# Altium PCB PCB1.PcbDoc
Units mm, origin at the board's own origin, x right, y up, seen from the top; angles counter-clockwise.
Board outline 56.4 x 56.4 mm, 4 copper layers (Top Layer, Layer 1, Layer 2, Bottom Layer), stack 0.603 mm thick; 62 components, 46 nets, 248 pads, 167 vias.
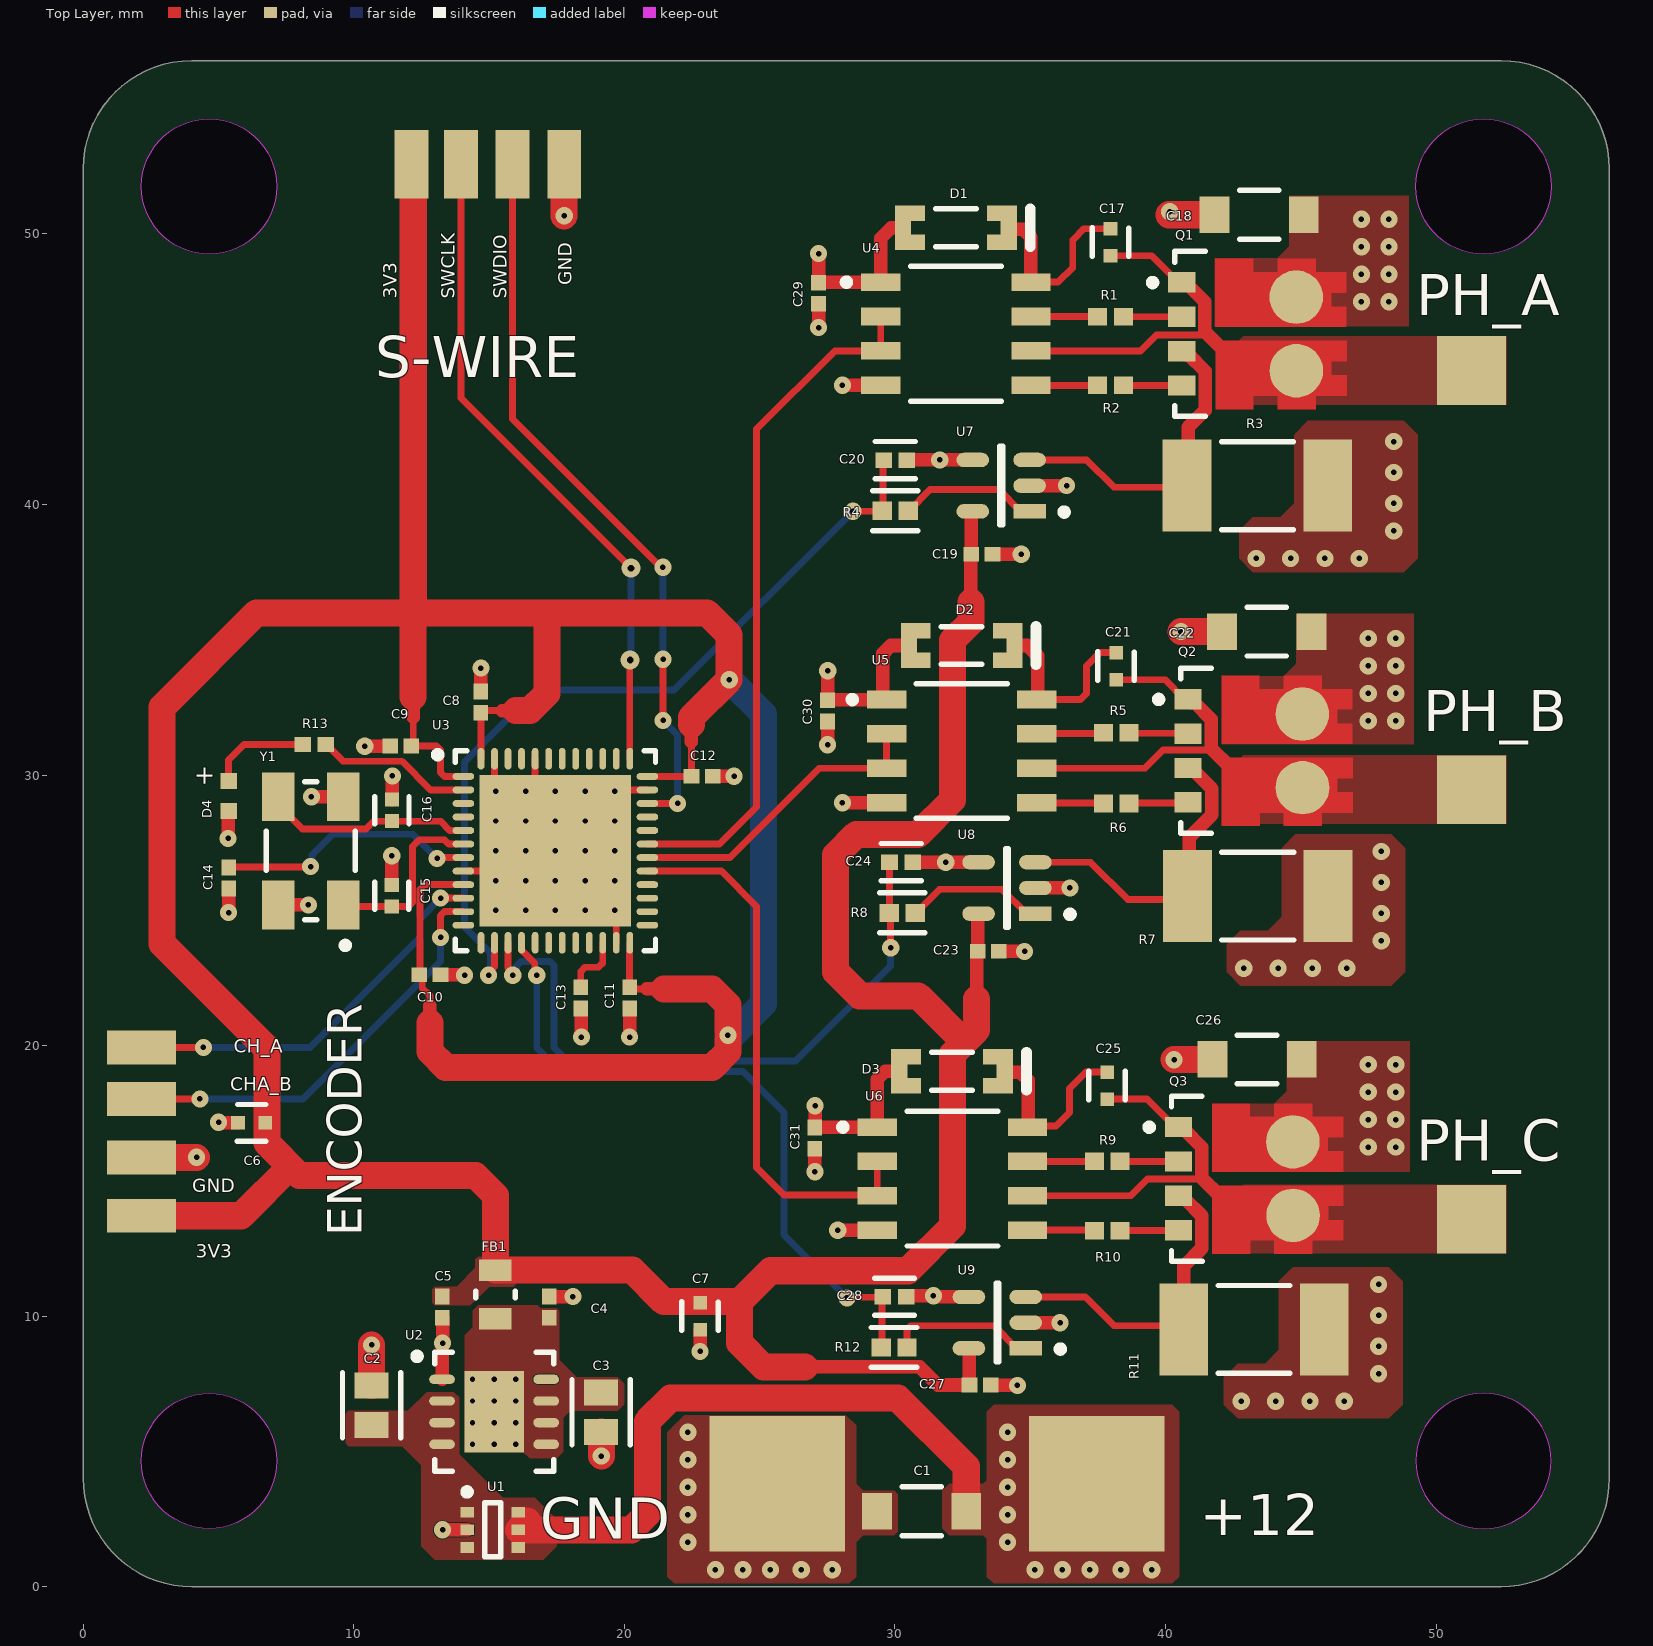
[diagram p0: Top Layer view]
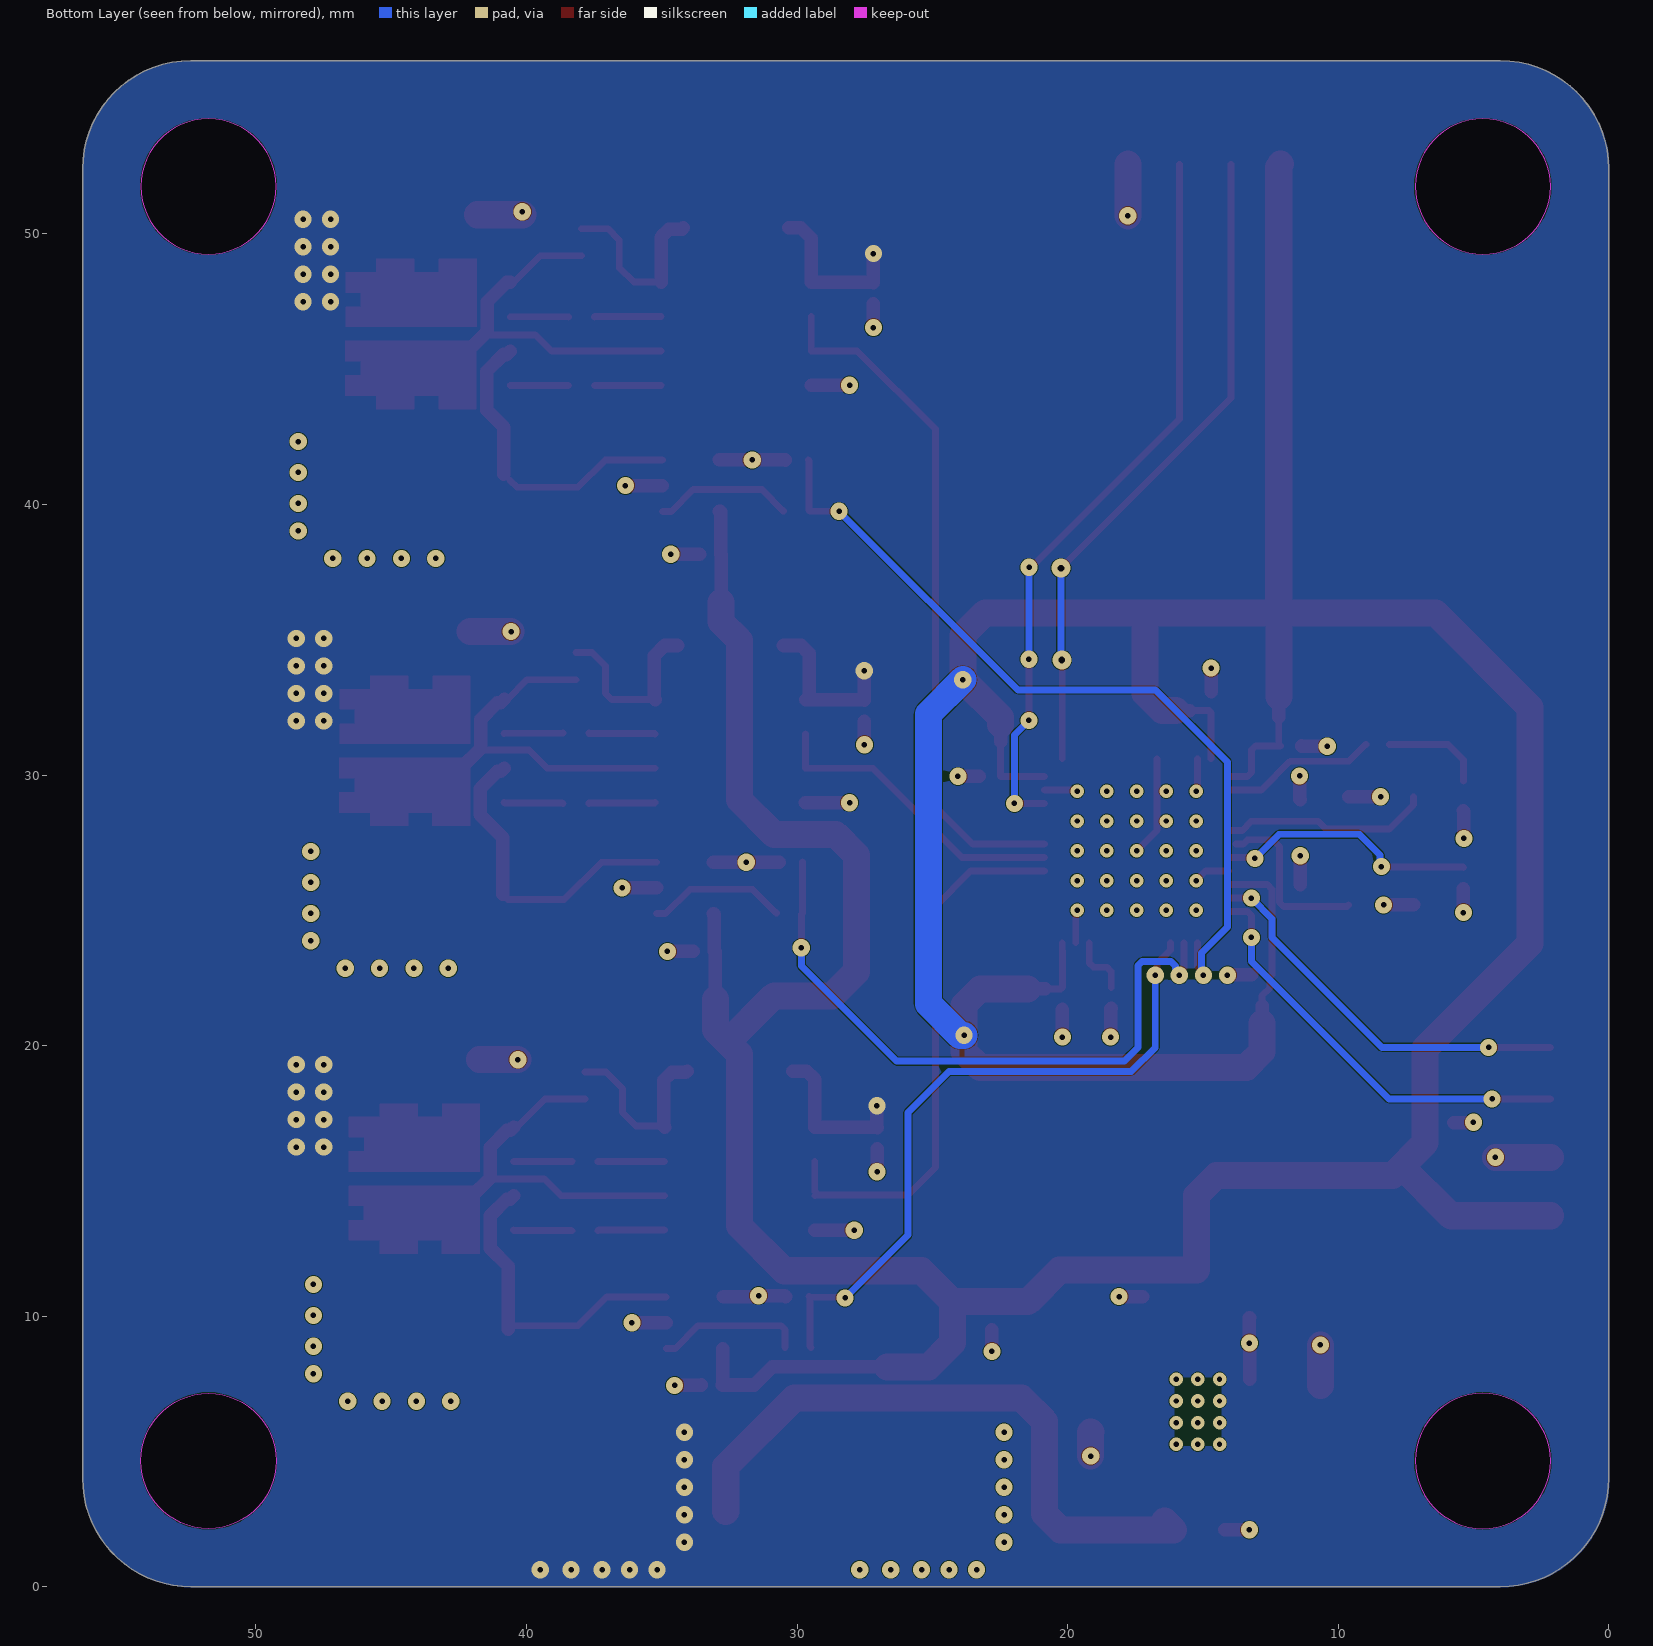
[diagram p1: Bottom Layer view, seen from below]
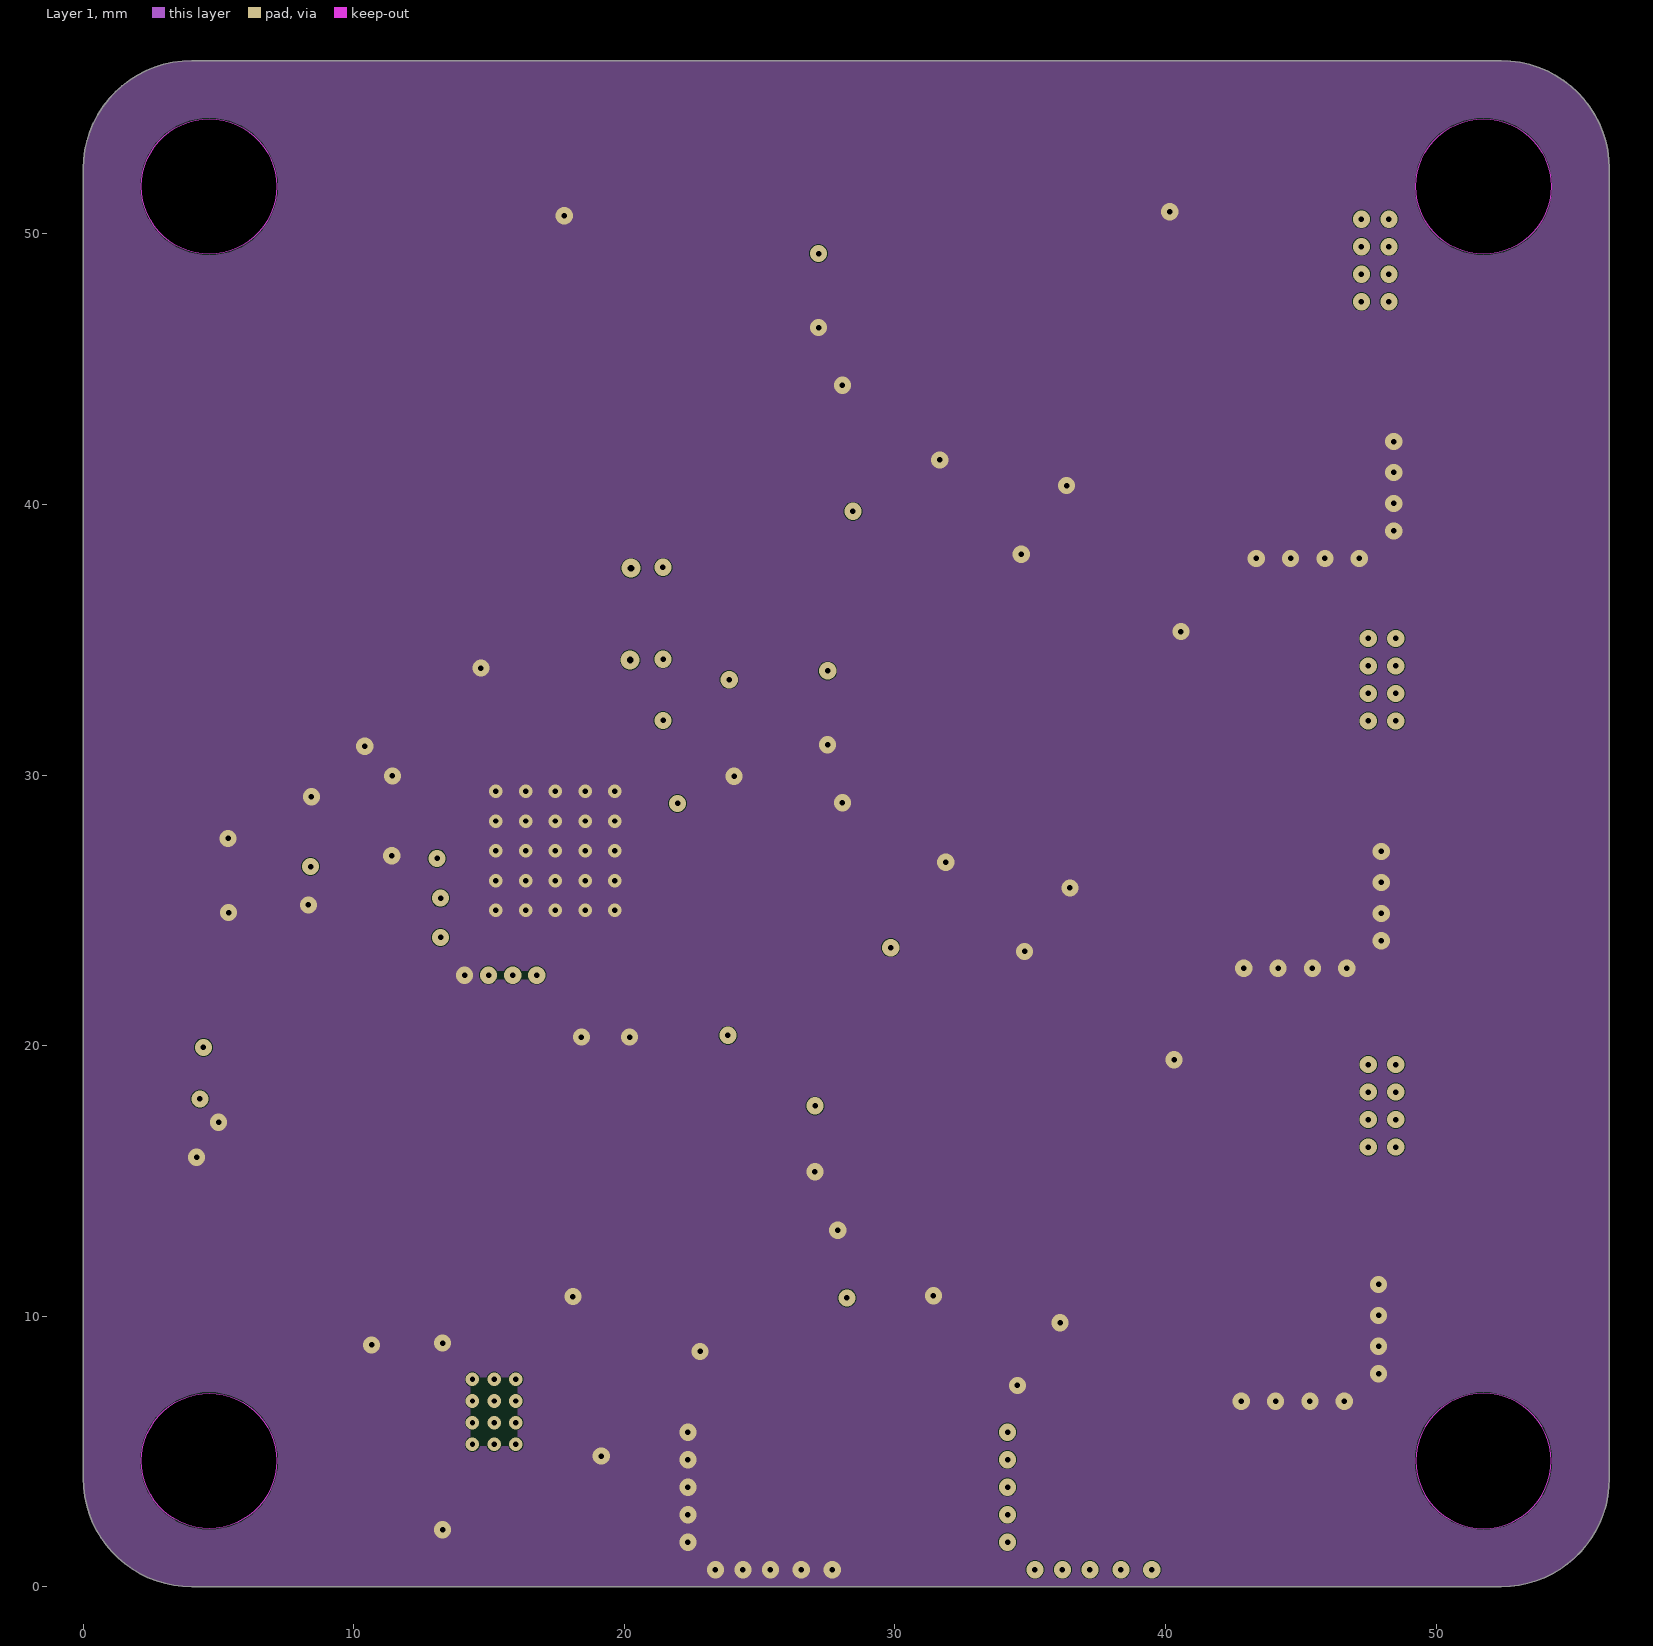
[diagram p2: Layer 1]
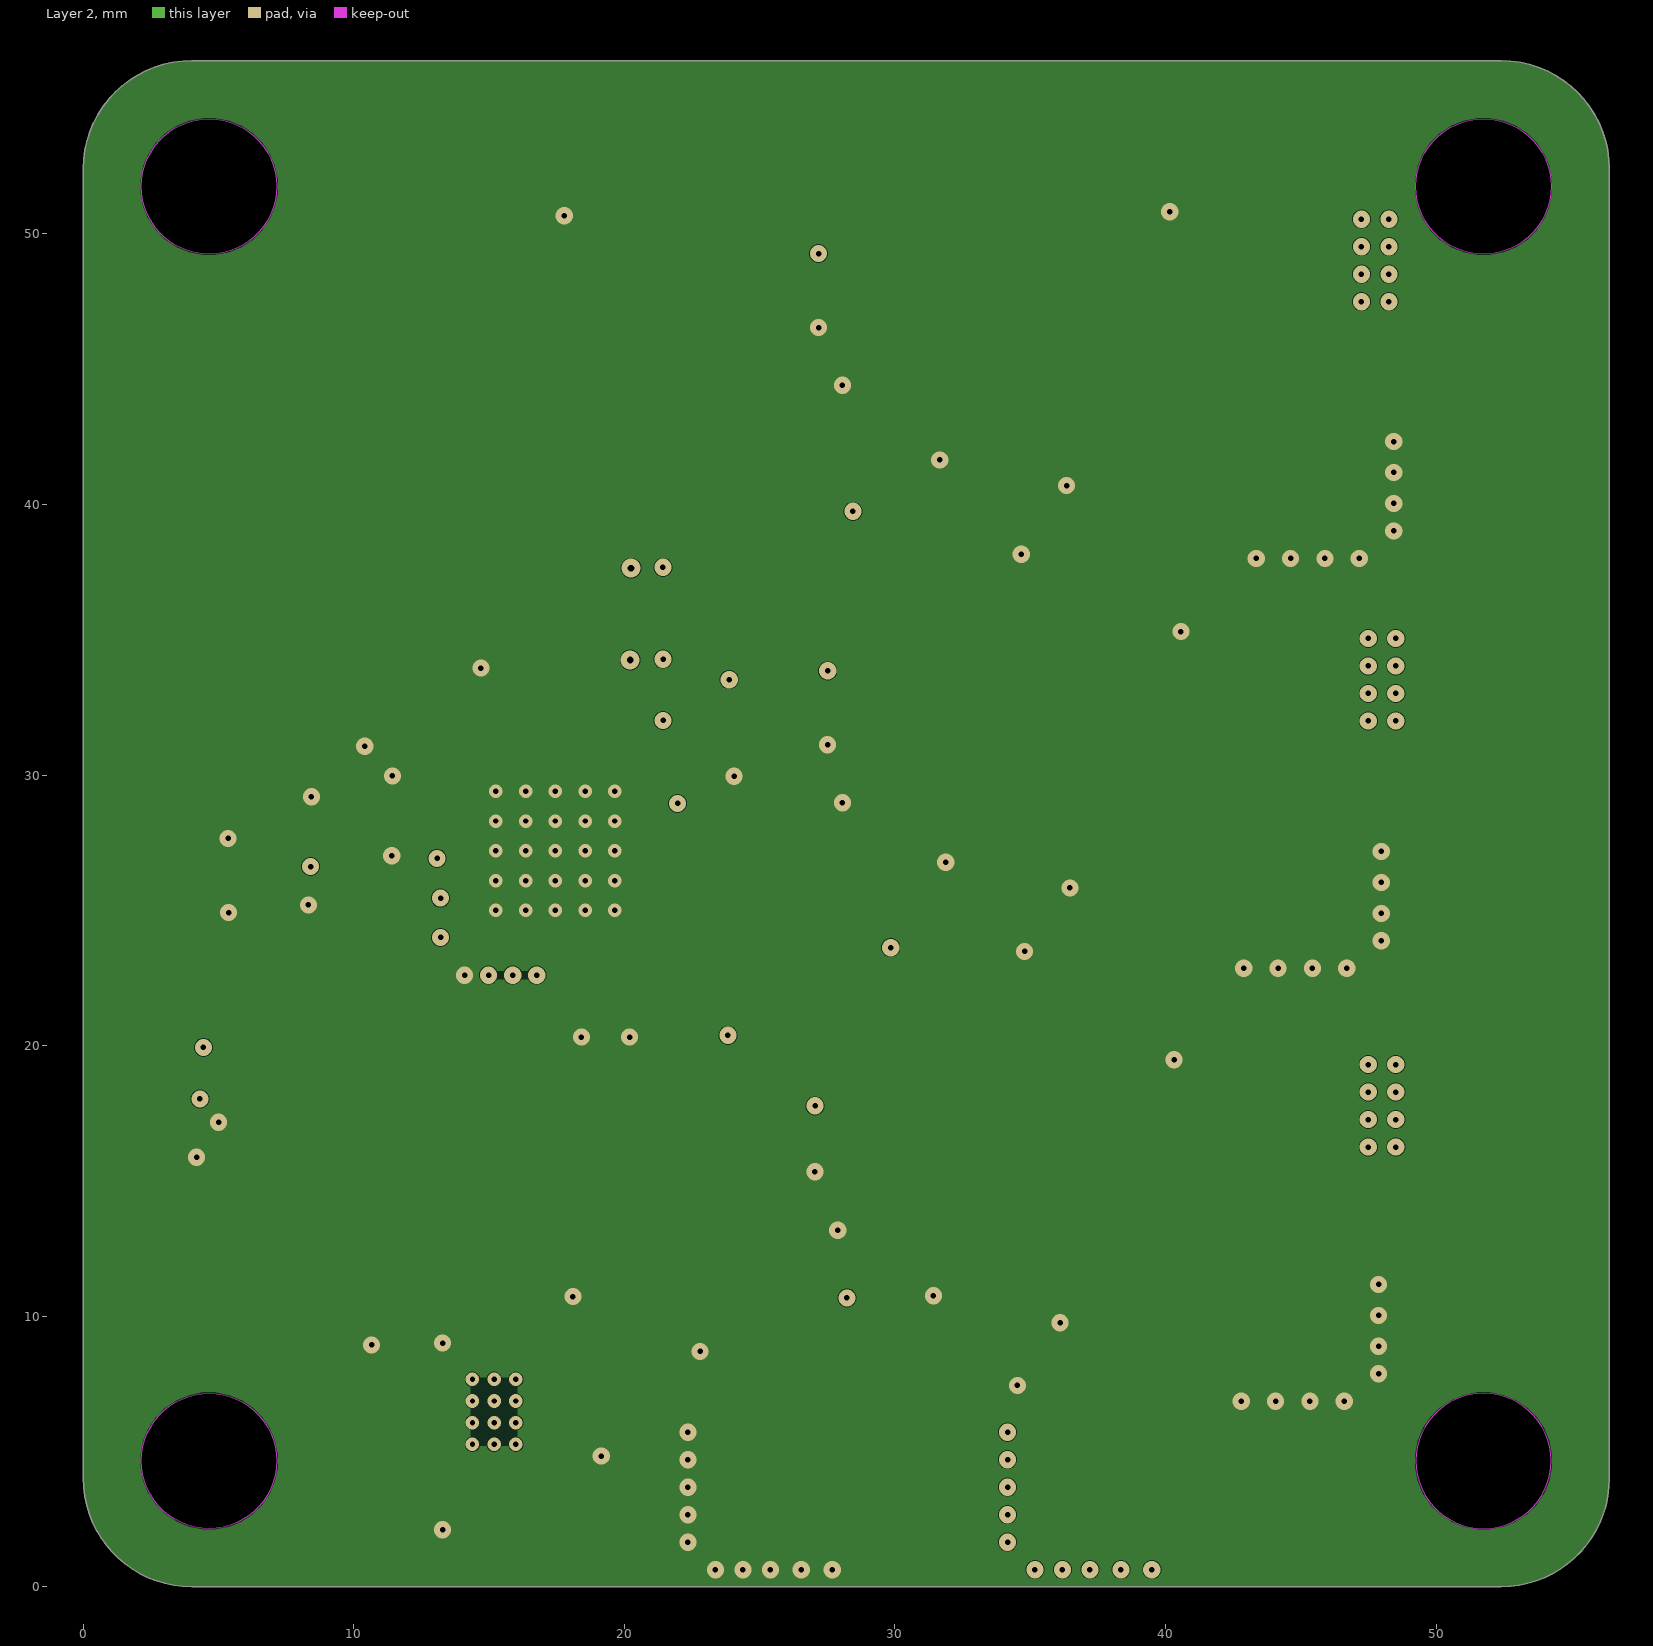
[diagram p3: Layer 2]
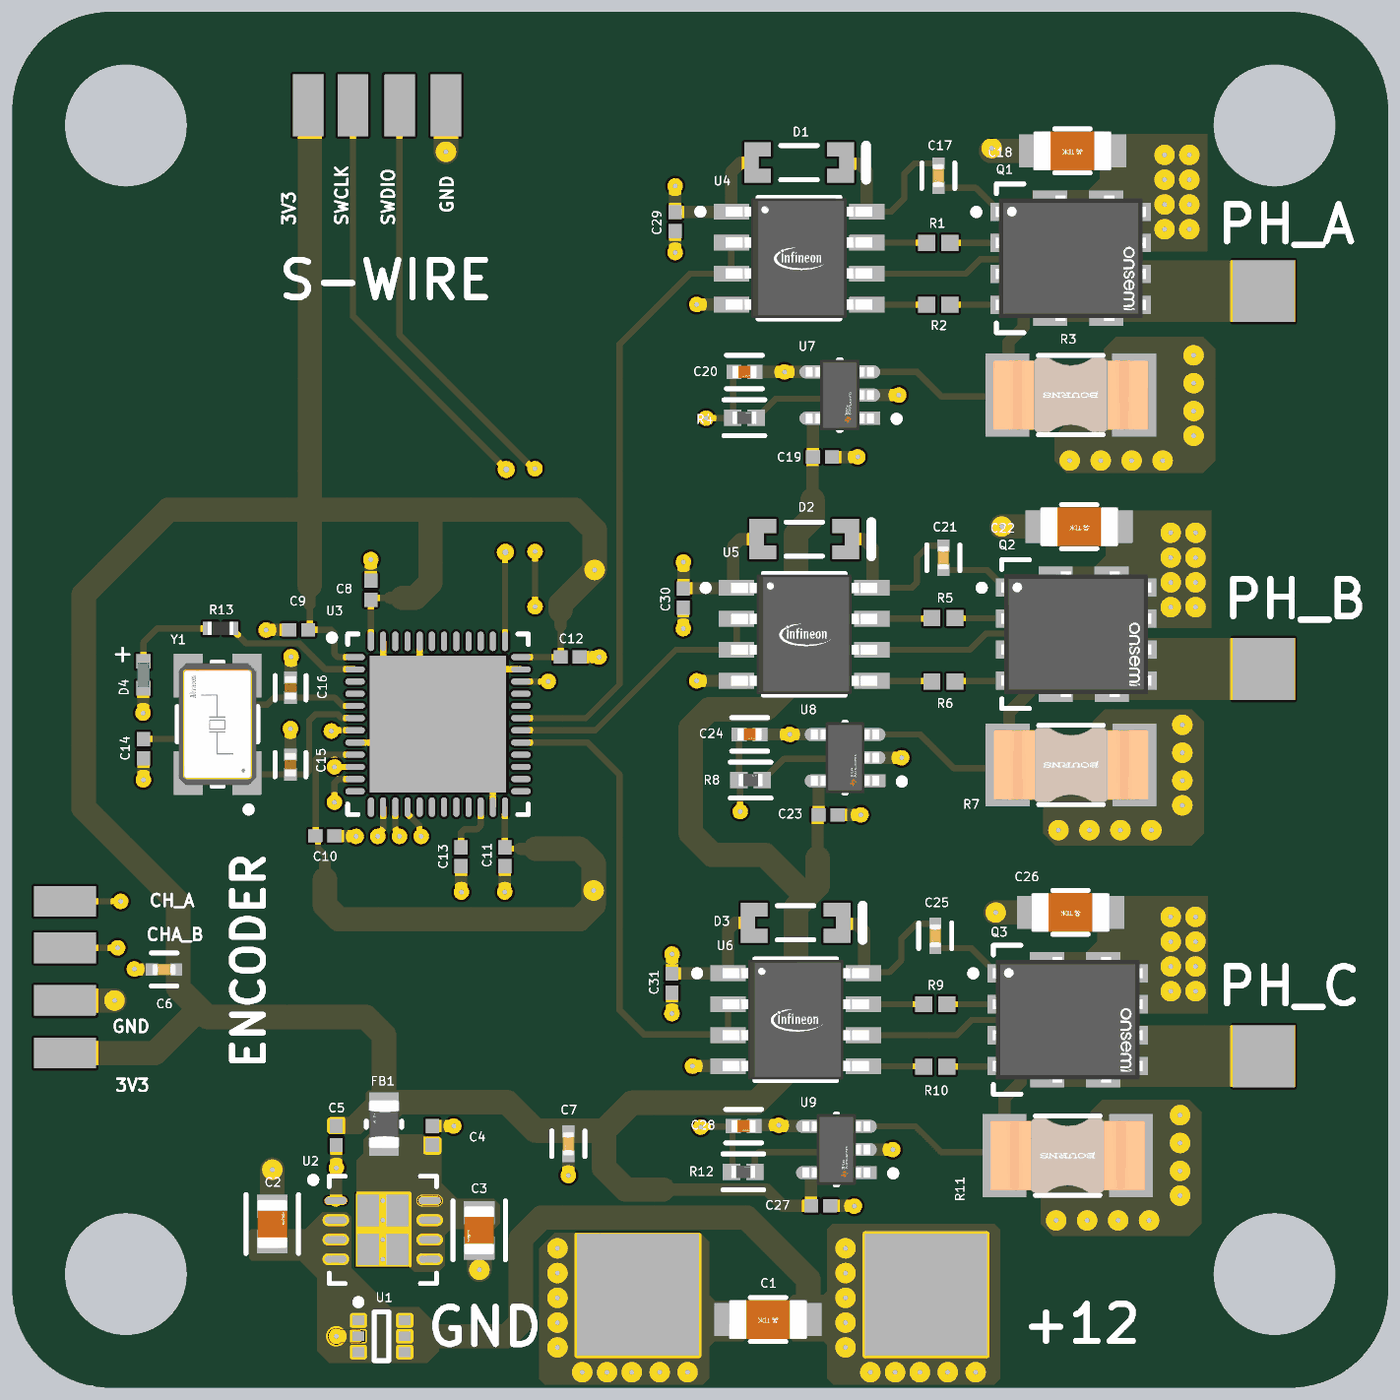
[diagram p4: 3D render of the assembled board from above, using the file's embedded part models]

## Layer stack, top to bottom
Top Solder: solder mask 0.0102, Solder Resist, Dk 3.5
Top Layer: signal copper 0.0356
Dielectric 2: prepreg 0.0711, PP-006, Dk 4.1
Layer 1: signal copper 0.035
Dielectric 1: dielectric 0.32, FR-4, Dk 4.8
Layer 2: signal copper 0.035
Dielectric 3: prepreg 0.0711, PP-006, Dk 4.1
Bottom Layer: signal copper 0.0356
Bottom Solder: solder mask 0.0102, Solder Resist, Dk 3.5

## Board outline
0.006,4.006 0.006,52.406 cw(c4.006,52.406) 4.006,56.406 52.406,56.406 cw(c52.406,52.406) 56.406,52.406 56.406,4.006 cw(c52.406,4.006) 52.406,0.006 4.006,0.006 cw(c4.006,4.006)
cut-out: 4.656,2.156 cw(c4.656,4.656) 2.156,4.656 cw(c4.656,4.656) 4.656,7.156 cw(c4.656,4.656) 7.156,4.656 cw(c4.656,4.656)
cut-out: 49.256,4.656 ccw(c51.756,4.656) 51.756,2.156 ccw(c51.756,4.656) 54.256,4.656 ccw(c51.756,4.656) 51.756,7.156 ccw(c51.756,4.656)
cut-out: 51.756,49.256 cw(c51.756,51.756) 49.256,51.756 cw(c51.756,51.756) 51.756,54.256 cw(c51.756,51.756) 54.256,51.756 cw(c51.756,51.756)
cut-out: 4.656,49.256 cw(c4.656,51.756) 2.156,51.756 cw(c4.656,51.756) 4.656,54.256 cw(c4.656,51.756) 7.156,51.756 cw(c4.656,51.756)

## Design rules (kind name [scope] priority, off if disabled: settings)
Clearance [All] p1: gap=0.025 ignorepadtopadclearanceinfootprint=TRUE
MinimumSolderMaskSliver [All] p1: minsoldermaskwidth=0.025
PolygonConnect [All] p1: connectstyle=Direct reliefconductorwidth=0.254 reliefentries=4 polygonreliefangle="90 Angle" airgapwidth=0.254
RoutingVias [All] p1: holewidth=0.25 width=0.7 viastyle="Through Hole" minholewidth=0.2 minwidth=0.5 maxholewidth=0.35 maxwidth=0.8
ShortCircuit [All] p1: allowed=TRUE
SolderMaskExpansion [All] p1: expansion=0.102 istentingtop=FALSE
SupplyNets "Schematic Supply Nets_3" [InNet('+3V3')] p1: voltage=0.000
SupplyNets "Schematic Supply Nets_2" [InNet('+12')] p2: voltage=0.000
SupplyNets "Schematic Supply Nets_1" [InNet('+3V3R')] p3: voltage=0.000
SupplyNets "Schematic Supply Nets" [InNet('GND')] p4: voltage=0.000
Width [All] p1: maxlimit=1 minlimit=0.254 preferedwidth=0.254
28 further rules are at their usual default settings.

## Components (designator, comment, footprint, x,y, rotation, side; value= is the part's Value field where it differs from the comment)
C1 "47u" FP-C3216-160-0_2-MFG 30.988,2.794 r180 top
C2 "10u" FP-GRM21B-0_1-IPC_C 10.66,6.711 r90 top
C3 "10u" FP-GRM21B-0_1-IPC_C 19.143,6.452 r270 top
C4 "100n" CAPC1005X56X25LL10T15 17.221,10.338 r270 top
C5 "100n" CAPC1005X56X25LL10T15 13.279,10.338 r90 top
C6 "1u" FP-CC0402-MFG 6.223,17.145 r180 top value="1 uF"
C7 "1u" FP-CC0402-MFG 22.8,10 r270 top value="1 uF"
C8 "100n" CAPC1005X56X25LL10T15 14.7,32.7 r270 top
C9 "100n" CAPC1005X56X25LL10T15 11.74,31.078 r0 top
C10 "100n" CAPC1005X56X25LL10T15 12.816,22.624 r180 top
C11 "100n" CAPC1005X56X25LL10T15 20.196,21.768 r90 top
C12 "100n" CAPC1005X56X25LL10T15 22.875,29.957 r180 top
C13 "100n" CAPC1005X56X25LL10T15 18.393,21.768 r90 top
C14 "100n" CAPC1005X56X25LL10T15 5.379,26.198 r90 top
C15 "22p" FP-C0402-BB-MFG 11.405,25.547 r90 top value="22 pF"
C16 "22p" FP-C0402-BB-MFG 11.409,28.698 r90 top value="22 pF"
C17 "1u" FP-CC0402-MFG 37.97,49.695 r270 top value="1 uF"
C18 "47u" FP-C3216-160-0_2-MFG 43.466,50.71 r180 top
C19 "100n" CAPC1005X56X25LL10T15 33.217,38.164 r0 top
C20 "1n" FP-GRM155-0_05-IPC_B 30.017,41.645 r0 top
C21 "1u" FP-CC0402-MFG 38.178,34.027 r270 top value="1 uF"
C22 "47u" FP-C3216-160-0_2-MFG 43.745,35.302 r180 top
C23 "100n" CAPC1005X56X25LL10T15 33.449,23.484 r0 top
C24 "1n" FP-GRM155-0_05-IPC_B 30.233,26.786 r0 top
C25 "1u" FP-CC0402-MFG 37.846,18.528 r270 top value="1 uF"
C26 "47u" FP-C3216-160-0_2-MFG 43.386,19.492 r180 top
C27 "100n" CAPC1005X56X25LL10T15 33.149,7.46 r0 top
C28 "1n" FP-GRM155-0_05-IPC_B 29.987,10.724 r0 top
C29 "100n" CAPC1005X56X25LL10T15 27.179,47.808 r90 top
C30 "100n" CAPC1005X56X25LL10T15 27.512,32.375 r90 top
C31 "100n" CAPC1005X56X25LL10T15 27.045,16.584 r90 top
D1 "LL4148" FAIR-SOD80-2_V 32.255,50.229 r0 top
D2 "LL4148" FAIR-SOD80-2_V 32.471,34.791 r0 top
D3 "LL4148" FAIR-SOD80-2_V 32.115,19.061 r0 top
D4 "blue_led" WL-SMCC_0402_L1W0.5H0.4 5.379,29.228 r90 top
FB1 "100R" FP-MPZ2012-MFG 15.239,10.805 r90 top
Q1 "NVMFD5C4" FP-506BT-MFG 43.399,46.306 r270 top
Q2 "NVMFD5C4" FP-506BT-MFG 43.623,30.898 r270 top
Q3 "NVMFD5C4" FP-506BT-MFG 43.275,15.088 r270 top
R1 "100R" RESC1005X40X25ML05T10 37.97,46.939 r0 top
R2 "100R" RESC1005X40X25ML05T10 37.97,44.405 r0 top
R3 "2mR" FP-CSS2H-2512K-2L00F-MFG 43.399,40.699 r180 top
R4 "1k" FP-RC0402-0_4-IPC_A 30.017,39.768 r0 top
R5 "100R" RESC1005X40X25ML05T10 38.178,31.559 r0 top
R6 "100R" RESC1005X40X25ML05T10 38.178,28.952 r0 top
R7 "2mR" FP-CSS2H-2512K-2L00F-MFG 43.412,25.532 r180 top
R8 "1k" FP-RC0402-0_4-IPC_A 30.274,24.91 r0 top
R9 "100R" RESC1005X40X25ML05T10 37.846,15.729 r0 top
R10 "100R" RESC1005X40X25ML05T10 37.846,13.159 r0 top
R11 "2mR" FP-CSS2H-2512K-2L00F-MFG 43.275,9.514 r180 top
R12 "1k" FP-RC0402-0_4-IPC_A 29.971,8.848 r0 top
R13 "2k2" RESC1005X40X25NL5T10 8.543,31.128 r0 top
U1 "SMF15CT1G" ONSC-SC70-6-419B-02_W_V 15.138,2.108 r0 top
U2 "TLV1117-33CDRJRG4" DRJ8-3000X2200TP 15.189,6.469 r0 top
U3 "STM32F411CEU6" STM-UFQFPN48_L 17.454,27.203 r0 top
U4 "IR2103STRPBF" FP-PG-DSO-8-MFG 32.255,46.314 r0 top
U5 "IR2103STRPBF" FP-PG-DSO-8-MFG 32.471,30.89 r0 top
U6 "IR2103STRPBF" FP-PG-DSO-8-MFG 32.122,15.088 r0 top
U7 "100V/V" FP-DBV0005A-IPC_C 33.929,40.699 r180 top
U8 "100V/V" FP-DBV0005A-IPC_C 34.144,25.83 r180 top
U9 "100V/V" FP-DBV0005A-IPC_C 33.789,9.764 r180 top
Y1 "24MHz" FP-ABM3B-MFG 8.413,27.203 r90 top

## Footprints (in the part's own frame and the unit in brackets; to place one, negate y for a bottom-side part, rotate by r counter-clockwise, add the part's x,y. Pads: shape width x height; smd on the part's side, far side on the other; paste and mask are expansions set on the pad)
CAPC1005X56X25LL10T15 [mm] "Chip Capacitor, 2-Leads, Body 1.00x0.50mm, IPC High Density"
  rect 0.58x0.54 smd: 1(-0.39,0) 2(0.39,0)
  body extent -0.55,-0.3 0.55,0.3, height 0.56
DRJ8-3000X2200TP [mm] "SON, 8-Leads, Body 4x4mm, Pitch 0.8mm, Thermal Pad 3x2.2mm, TI Recommended"
  oval 0.95x0.35 smd paste-0.025 mask+0.07: 1(-1.925,1.2) 2(-1.925,0.4) 3(-1.925,-0.4) 4(-1.925,-1.2) 5(1.925,-1.2) 6(1.925,-0.4) 7(1.925,0.4) 8(1.925,1.2)
  rect 2.2x3 smd paste-1.1 mask+0.07: 9(0,0)
  silkscreen extent -2.97,-2.2 2.2,2.2, body extent -2.05,-2.05 2.05,2.05, height 0.8
FAIR-SOD80-2_V [mm] "SOD, 2-Leads, Body 3.45x1.4mm"
  rect 0.6x1.65 smd: 1(-1.95,0) 2(1.95,0)
  rect 1.1x0.575 smd: ""(-1.7,-0.537) ""(-1.7,0.537) ""(1.7,-0.537) ""(1.7,0.537)
  silkscreen extent -0.75,-0.7 2.75,0.7, body extent -1.73,-0.7 1.73,0.7, height 2.1
FP-506BT-MFG [mm]
  rect 0.75x1 smd paste+0 mask+0: 1(-1.905,-2.795) 2(-0.635,-2.795) 3(0.635,-2.795) 4(1.905,-2.795)
  round 1.981 smd paste+0 mask+0: 5-6(1.36,1.442) 7-8(-1.36,1.437)
  Top Layer region: -2.775,-1.55 -0.26,-1.55 -0.26,3.29 -1.01,3.29 -1.01,2.73 -1.53,2.73 -1.53,3.29 -2.28,3.29 -2.28,2.15 -2.775,2.15 -2.775,0.75 -2.28,0.75 -2.28,-0.15 -2.775,-0.15 -2.775,-1.55
  Top Layer region: 2.775,-1.545 0.26,-1.545 0.26,3.295 1.01,3.295 1.01,2.735 1.53,2.735 1.53,3.295 2.28,3.295 2.28,2.155 2.775,2.155 2.775,0.755 2.28,0.755 2.28,-0.145 2.775,-0.145 2.775,-1.545
  silkscreen extent -3.05,-4 3.05,-1.92, body extent -2.88,-3.39 2.88,3.39, height 0.25
FP-ABM3B-MFG [mm]
  rect 1.8x1.2 smd paste+0 mask+0: 1(-2,-1.2) 2(2,-1.2) 3(2,1.2) 4(-2,1.2)
  silkscreen extent -3.62,-1.65 2.55,1.65, body extent -3,-1.9 3,1.9, height 0.25
FP-C0402-BB-MFG [mm]
  rect 0.52x0.52 smd paste+0 mask+0: 1(-0.4,0) 2(0.4,0)
  silkscreen extent -0.5,-0.64 0.5,0.64, body extent -0.8,-0.4 0.8,0.4, height 0.25
FP-C3216-160-0_2-MFG [mm]
  rect 1.1x1.35 smd paste+0 mask+0: 1(-1.65,0) 2(1.65,0)
  silkscreen extent -0.72,-0.9 0.72,0.9, body extent -2.3,-1 2.3,1, height 0.25
FP-CC0402-MFG [mm]
  rect 0.5x0.5 smd paste+0 mask+0: 1(-0.5,0) 2(0.5,0)
  silkscreen extent -0.53,-0.68 0.53,0.67, body extent -0.87,-0.48 0.87,0.48, height 0.25
FP-CSS2H-2512K-2L00F-MFG [mm]
  rect 1.8x3.4 smd paste+0 mask+0: 1(-2.6,0) 2(2.6,0)
  silkscreen extent -1.33,-1.63 1.33,1.63, body extent -3.6,-1.8 3.6,1.8, height 0.25
FP-DBV0005A-IPC_C [mm]
  rect 1.205x0.532 smd paste+0 mask+0: 1(-1.05,0.95)
  rrect100% 1.205x0.532 smd paste+0 mask+0: 2(-1.05,0) 3(-1.05,-0.95) 4(1.05,-0.95) 5(1.05,0.95)
  silkscreen extent -2.45,-1.45 0.05,1.45, body extent -1.75,-1.55 1.75,1.55, height 0.25
FP-GRM21B-0_1-IPC_C [mm]
  rect 0.958x1.262 smd paste+0 mask+0: 1(-0.727,0) 2(0.727,0)
  silkscreen extent -1.21,-1.07 1.21,1.07, body extent -1.31,-0.77 1.31,0.77, height 0.25
FP-GRM155-0_05-IPC_B [mm]
  rect 0.615x0.572 smd paste+0 mask+0: 1(-0.429,0) 2(0.429,0)
  silkscreen extent -0.74,-0.69 0.74,0.69, body extent -0.89,-0.44 0.89,0.44, height 0.25
FP-MPZ2012-MFG [mm]
  rect 0.8x1.2 smd paste+0 mask+0: 1(-0.9,0) 2(0.9,0)
  silkscreen extent -0.13,-0.72 0.13,0.72, body extent -1.4,-0.82 1.4,0.82, height 0.25
FP-PG-DSO-8-MFG [mm]
  rect 1.45x0.65 smd paste+0 mask+0: 1(-2.775,1.905) 2(-2.775,0.635) 3(-2.775,-0.635) 4(-2.775,-1.905) 5(2.775,-1.905) 6(2.775,-0.635) 7(2.775,0.635) 8(2.775,1.905)
  silkscreen extent -4.17,-2.49 1.68,2.49, body extent -3.6,-2.59 3.6,2.59, height 0.25
FP-RC0402-0_4-IPC_A [mm]
  rect 0.715x0.672 smd paste+0 mask+0: 1(-0.479,0) 2(0.479,0)
  silkscreen extent -0.84,-0.74 0.84,0.74, body extent -1.04,-0.54 1.04,0.54, height 0.25
ONSC-SC70-6-419B-02_W_V [mm] "SOT23, 6-Leads, Body 2x1.25mm, Pitch 0.65mm"
  rect 0.5x0.4 smd: 1(-0.95,0.65) 2(-0.95,0) 3(-0.95,-0.65) 4(0.95,-0.65) 5(0.95,0) 6(0.95,0.65)
  silkscreen extent -1.07,-1 0.3,1.52, body extent -0.63,-1 0.63,1, height 1.1
RESC1005X40X25ML05T10 [mm] "Chip Resistor, 2-Leads, Body 1.00x0.50mm, IPC Low Density"
  rect 0.7x0.65 smd: 1(-0.475,0) 2(0.475,0)
  body extent -0.53,-0.27 0.53,0.28, height 0.4
RESC1005X40X25NL5T10 [mm] "Chip Resistor, 2-Leads, Body 1.05x0.55mm, IPC Medium Density"
  rect 0.6x0.55 smd: 1(-0.425,0) 2(0.425,0)
  body extent -0.53,-0.28 0.53,0.28, height 0.4
STM-UFQFPN48_L [mm] "QFN, 48-Leads, Body 7.1x7.1mm, Pitch 0.5mm, Thermal Pad 5.6x5.6mm, IPC High Density"
  oval 0.8x0.25 smd: 1(-3.4,2.75) 2(-3.4,2.25) 3(-3.4,1.75) 4(-3.4,1.25) 5(-3.4,0.75) 6(-3.4,0.25) 7(-3.4,-0.25) 8(-3.4,-0.75) 9(-3.4,-1.25) 10(-3.4,-1.75) 11(-3.4,-2.25) 12(-3.4,-2.75) 25(3.4,-2.75) 26(3.4,-2.25) 27(3.4,-1.75) 28(3.4,-1.25) 29(3.4,-0.75) 30(3.4,-0.25) 31(3.4,0.25) 32(3.4,0.75) 33(3.4,1.25) 34(3.4,1.75) 35(3.4,2.25) 36(3.4,2.75)
  oval 0.25x0.8 smd: 13(-2.75,-3.4) 14(-2.25,-3.4) 15(-1.75,-3.4) 16(-1.25,-3.4) 17(-0.75,-3.4) 18(-0.25,-3.4) 19(0.25,-3.4) 20(0.75,-3.4) 21(1.25,-3.4) 22(1.75,-3.4) 23(2.25,-3.4) 24(2.75,-3.4) 37(2.75,3.4) 38(2.25,3.4) 39(1.75,3.4) 40(1.25,3.4) 41(0.75,3.4) 42(0.25,3.4) 43(-0.25,3.4) 44(-0.75,3.4) 45(-1.25,3.4) 46(-1.75,3.4) 47(-2.25,3.4) 48(-2.75,3.4)
  rect 5.6x5.6 smd: 49(0,0)
  silkscreen extent -4.47,-3.7 3.7,3.7, body extent -3.55,-3.55 3.55,3.55, height 0.6
WL-SMCC_0402_L1W0.5H0.4 [mm] "SMD Mono-color Chip LED Compact, body 1x0.5mm"
  rect 0.6x0.6 smd: 1(-0.55,0) 2(0.55,0)
  body extent -0.5,-0.25 0.5,0.25, height 0.4

## Part data
C1 C18 C22 C26: library part CMP-2000-05397-3, "Multilayer Ceramic Capacitors 47uF ±20% 25V X5R SMD 1206", Capacitance=47uF, Case Code (Imperial)=1206, Case Code (Metric)=3216, Dielectric=X5R, Dielectric Material=Ceramic, Max Operating Temperature=85°C, Min Operating Temperature=-55°C, Package Quantity=1, Tolerance=20%, Voltage=25V, Case/Package=1206, Depth=1.6mm, Height=1.6mm, Lead Free="Lead Free", Length=0.126inch, Mount="Surface Mount", Packaging="Tape and Reel", REACH SVHC="No SVHC", Resistor Type=Ceramic, RoHS Compliant=Yes, Series=C, Termination=SMD/SMT, Thickness=0.071inch, Voltage Rating=25V, Voltage Rating (DC)=25V, Weight=0.000571oz, Width=0.063inch
C2 C3: library part CMP-2007-03453-2, "Chip Multilayer Ceramic Capacitors for General Purpose, 0805, 10uF, X5R, 15%, 10%, 16V", Capacitance=10uF, Case Code (Imperial)=0805, Case Code (Metric)=2012, Dielectric=X5R, Max Operating Temperature=85°C, Min Operating Temperature=-55°C, Package Quantity=1, Tolerance=10%, Voltage=16V, Case/Package=0805, Depth=1.25mm, Height=1.25mm, Lead Free="Lead Free", Length=2mm, Material=Ceramic, Mount="Surface Mount", Packaging="Tape and Reel", Radiation Hardening=No, REACH SVHC="No SVHC", Termination=SMD/SMT, Thickness=0.053inch, Voltage Rating=16V, Voltage Rating (DC)=16V, Width=1.25mm
C4 C5 C8 C9 C10 C11 C12 C13 C14 C19 C23 C27 C29 C30 C31: library part CMP-2008-02743-1, Manufacturer="AVX Interconnect / Elco", Part Number=04026D104KAT2A
C6 C7 C17 C21 C25: library part CMP-2100-03591-2, "CAP CER 1UF 6.3V X5R 0402", Capacitance="1 uF", Manufacturer=YAGEO, Manufacturer Part Number=CC0402KRX5R5BB105, Package=CC0402, Temperature="-55°C to +125°C", Temperature Characteristic=X5R, Temperature Coefficient=30ppm/°C, Temperature Range High=+125°C, Temperature Range Low=-55°C, Tolerance=0.1, Voltage Rating="6.3 V", Automotive=No, Automotive Grade=NA, Category=Cap, ComponentLink2Description=Datasheet, ComponentLink2URL=http://www.yageo.com/documents/recent/UPY-GP_NP0_16V-to-50V_16.pdf, Device Class L1="Passive Components", Device Class L2=Capacitors, Device Class L3="Ceramic Capacitors", Digikey Description="CAP CER 1UF 6.3V X5R 0402", Footprint Url=http://www.yageo.com/exep/pages/download/literatures/UPY-C_GEN_24.pdf, Height=0.55mm, Ipc Land Pattern Name=CAPC10050X50, Lead Free=Yes, Material=Ceramic, Mouser Description="Multilayer Ceramic Capacitors MLCC - SMD/SMT 1uF 6.3V X5R 10%", Octopart=https://octopart.com/cc0402krx5r5bb105-yageo-42244618, RoHS=TRUE
C15 C16: library part CMP-2008-03360-2, "CAP CER 22PF 16V 5% NP0 0402", Capacitance="22 pF", Manufacturer=Kemet, Manufacturer Part Number=C0402C220J4GACTU, Package=C0402-BB, Temperature="-55°C to +125°C", Temperature Characteristic=C0G, Temperature Coefficient=15%, Temperature Range High=+125°C, Temperature Range Low=-55°C, Tolerance=0.05, Voltage Rating="16 V", Automotive=No, Category=Cap, ComponentLink2Description=Datasheet, ComponentLink2URL=https://content.kemet.com/datasheets/KEM_C1002_X7R_SMD.pdf, Device Class L1="Passive Components", Device Class L2=Capacitors, Device Class L3="Ceramic Capacitors", Digikey Description="CAP CER 22PF 16V 5% NP0 0402", Height=0.55mm, Ipc Land Pattern Name=CAPC10050X50, Lead Free=Yes, Material=Ceramic, Mouser Description="Multilayer Ceramic Capacitors MLCC - SMD/SMT 16volts 22pF C0G 5%", Octopart=https://octopart.com/c0402c220j4gactu-kemet-9139401, RoHS=TRUE
C20 C24 C28: library part CMP-2008-04254-2, "Chip Multilayer Ceramic Capacitors for General Purpose, 0402, 1000pF, C0G, 30ppm/°C, 5%, 50V", Capacitance=1nF, Case Code (Imperial)=0402, Case Code (Metric)=1005, Dielectric=C0G, Dielectric Material=Ceramic, Insulation Resistance=10GR, Max Operating Temperature=125°C, Min Operating Temperature=-55°C, Package Quantity=1, Temperature Coefficient=30ppm/°C, Tolerance=5%, Voltage=50V, Case/Package=0402, Depth=0.5mm, Height=0.5mm, Lead Free="Lead Free", Length=1mm, Material=Ceramic, Mount="Surface Mount", Number of Pins=2, Packaging="Tape and Reel", Radiation Hardening=No, REACH SVHC="No SVHC", Termination=SMD/SMT, Thickness=0.022inch, Voltage Rating=50V, Voltage Rating (DC)=50V, Width=0.5mm
D1 D2 D3: library part CMP-2000-05115-2, "Small Signal Diode, 100 V, 0.2 A, -55 to 175 degC, 2-Pin SOD80, RoHS, Tape and Reel", Average Forward Current-Max=200mA, Forward Voltage=1V, Manufacturer=Fairchild, Power Dissipation=500mW, Reverse Voltage-Max [Vrrm]=100V, Datasheet URL=https://www.fairchildsemi.com/datasheets/LL/LL4148.pdf, Datasheet Version="Rev. 1.8, 01/2016", Manufacturer URL=https://www.fairchildsemi.com/, Reverse Recovery Time-Max=1ns
D4: library part CMP-03913-90235556-2, "WL-SMCC SMT Mono-Color Chip LED Compact", Forward Current=60mA, Forward Voltage=3.2V, Max Operating Temperature=85°C, Max Reverse Voltage (DC)=5V, Min Operating Temperature=-40°C, Dominant Wavelength=470nm, Height=400µm, Length=1mm, Luminous Intensity=150mcd, Packaging="Tape and Reel", Peak Wavelength=465nm, RoHS=Compliant, Viewing Angle=120°, Wavelength=470nm, Width=500µm
FB1: library part CMP-2000-05401-2, Case Code (Imperial)=0805, Case Code (Metric)=2012, Current Rating=2A, DC Resistance (DCR)=100mΩ, Manufacturer Lifecycle Status=PRODUCTION, Max Operating Temperature=125°C, Min Operating Temperature=-55°C, Test Frequency=100MHz, Tolerance=25%, Case/Package=0805, Core Material=Ferrite, Height=1.0414mm, Impedance=600Ω, Lead Free="Lead Free", Length=2mm, Lifecycle Status=Production, Max DC Current=2A, Max Length=2.2mm, Max Width=1.45mm, Min Length=1.8mm, Min Width=1.05mm, Mount="Surface Mount", NexarPartId=12090955, Packaging=Digi-Reel®, REACH SVHC="No SVHC", Resistance=100mΩ, RMS Current (Irms)=2A, RoHS=Compliant, Schedule B="8504500000, 8504500000", Series Resistance=100mΩ, Width=1.25mm
Q1 Q2 Q3: library part CMP-00278-84330944-1, "NVMFD5C470NLWFT1G Trans MOSFET Array Dual N-CH 40V 11A 8-Pin SOIC-FL T/R", Drain to Source Resistance=9.2mΩ, Manufacturer Lifecycle Status=ACTIVE, Lifecycle Status=Production, NexarPartId=84330944, RoHS=Compliant, Schedule B=8541290080
R1 R2 R5 R6 R9 R10: library part CMP-2002-07344-1, Manufacturer="Yageo / Phycomp", Part Number=RC0402FR-07100RL
R3 R7 R11: library part CMP-00059-73869590-1, "CSS2H-2512K-2L00F SMD Current Sense Resistor, 2 Milliohm, ± 1%, 5 W, 2512 [6432 Metric], Metal Strip", Case Code (Imperial)=2512, Case Code (Metric)=6432, Max Operating Temperature=170°C, Max Power Dissipation=5W, Min Operating Temperature=-55°C, Resistance=2mΩ, Temperature Coefficient=50ppm/°C, Tolerance=1%, Case/Package=2512, Composition="Metal Element", Features="Moisture Resistant", Height=508µm, Length=6.35mm, NexarPartId=73869590, Number of Terminations=2, Packaging="Cut Tape", Power Rating=5W, REACH SVHC="No SVHC", RoHS=Compliant, Schedule B="8533210045, 8533210045", Width=3.048mm
R4 R8 R12: library part CMP-2002-07472-3, "RES 1K OHM 1% 1/16W 0402", Case Code (Imperial)=0402, Case Code (Metric)=1005, Max Operating Temperature=155°C, Max Power Dissipation=63mW, Min Operating Temperature=-55°C, Power Rating=62.5mW, Resistance=1kR, Resistance Tolerance=1%, Resistor Type="Thick Film", Temperature Coefficient=100ppm/°C, Voltage Rating=50V, Case/Package=0402, Construction=Rectangular, Depth=0.5mm, Features="Moisture Resistant", Height=0.32mm, Lead Free="Lead Free", Length=1mm, Military Standard=Not, Number of Pins=2, Number of Terminations=2, Packaging="Tape and Reel", Reach SVHC Compliant=Yes, RoHS Compliant=Yes, Series=RC, Size Code=0402, Technology="THICK FILM", Termination=SMD/SMT, Tolerance=1%, Voltage Rating (DC)=50V, Width=0.5mm
R13: library part CMP-2002-07969-2, "Chip Resistor, 2.2 KOhm, +/- 5%, 0.063 W, -55 to 155 degC, 0402 (1005 Metric), RoHS, Tape and Reel", Case Code (Imperial)=0402, Case Code (Metric)=1005, Max Operating Temperature="155 degC", Min Operating Temperature="-55 degC", Package Quantity=10000, Power Rating="63 mW", Resistance="2.2 kohm", Tolerance=5%, Voltage Rating="50 V", Case\Package=0402, ComponentLink1Description="Manufacturer URL", ComponentLink1URL=http://www.yageo.com/, ComponentLink2Description=Datasheet, ComponentLink2URL=http://www.yageo.com/documents/recent/PYu-RC_Group_51_RoHS_L_04.pdf, DatasheetVersion="Rev. 4, 02/2016", Height="0.35 mm", Length="1 mm", Mount="Surface Mount", Mounting Technology="Surface Mount", PackageDescription="2-Pin Surface Mount Device, Body 1 x 0.5 mm", PackageReference=0402, Packaging="Tape and Reel", Pins=2, REACH SVHC="No SVHC", RoHSCompliant=true, Voltage Rating (DC)="50 V", Width="0.5 mm"
U1: library part CMP-1061-00156-1, "5-Line Transient Voltage Suppressor Array, 6-Pin SC70, Pb-Free, Tape and Reel", Manufacturer="On Semiconductor", ComponentLink1Description="Manufacturer URL", ComponentLink1URL=http://www.onsemi.com/, ComponentLink2Description=Datasheet, ComponentLink2URL=http://www.onsemi.com/pub_link/Collateral/SMF05C-D.PDF, ComponentLink3Description="Package Specification", ComponentLink3URL=http://www.onsemi.com/pub_link/Collateral/SMF05C-D.PDF, DatasheetVersion="Rev. 4", Direction=Unidirectional, IR Max (uA)=1, Mounting Technology="Surface Mount", PackageDescription="6-Pin Small Outline Transistor, Body 2 x 1.25 mm, Pitch 0.65 mm", PackageReference=SC70-6-419B-02_W, PackageVersion="Rev. W", Packing="Tape and Reel", PartNumber=SMF15CT1G, PPK Max (W)=100, RoHS=Pb-Free
U2: library part CMP-0324-00190-2, "LDO with 4.7 to 15 V Input and 3.3 V Output, 0 to 125 degC, 8-Pin SON (DRJ), Green (RoHS & no Sb/Br)", Manufacturer="Texas Instruments", ComponentLink1Description=Datasheet, ComponentLink1URL=http://www.ti.com/general/docs/lit/getliterature.tsp?genericPartNumber=TLV1117-33&fileType=pdf, ComponentLink2Description="Package Specification", ComponentLink2URL=http://www.ti.com/litv/pdf/mpds153b, ComponentLink3Description="URL Link1", ComponentLink3URL="Samples URL:http://www.ti.com/product/tlv1117-33#samples", DatasheetVersion=SLVS561J, Eco-Plan="Green (RoHS & no Sb/Br)", Iout(Max)(A)=0.8, Iq(Typ)(mA)=5, Mounting Technology="Surface Mount", PackageDescription="8-Pin Plastic Small Outline No-Lead, 4 x 4 x 0.8 mm Body, 0.8 mm Pitch, Exposed Pad", PackageReference=DRJ8-3000X2200TP, PackageVersion="revC, Dec-2010", PartNumber=TLV1117-33CDRJRG4, SubFamily="Single Output LDO", Vin(Max)(V)=15, Vin(Min)(V)=4.7, Vout(Max)(V)=3.3, Vout(Min)(V)=3.3
U3: library part CMP-0243-00165-1, "ARM Cortex-M4 32-bit MCU+FPU, 512 KB Flash, 128 KB RAM, 36 I/Os, 48-Pin UFQFPN, -40 to 85 degC, Tray", I/Os (High Current)=36, Operating Frequency(F) (Processor speed) (MHz)=100, Package Description=UFQFPN48, Package Reference="48-Pin Ultra Thin Fine Pitch Quad Flat No-Lead, 7 x 7 x 0.6 mm Body, 0.5 mm Pitch, Exposed Pad", Supply Voltage(Vcc) min (V)=1.7, ComponentLink1Description="Manufacturer URL", ComponentLink1URL=http://www.st.com/, ComponentLink2Description=Datasheet, ComponentLink2URL=http://www.st.com/st-web-ui/static/active/en/resource/technical/document/datasheet/DM00115249.pdf, Core="ARM Cortex-M4", DatasheetVersion="Rev. 6", FLASH Size (Prog) (kB)=512, Internal RAM Size (kB)=128, Mounting Technology="Surface Mount", Packing=Tray
U4 U5 U6: library part CMP-32851-000120-1, "IC GATE DRVR HALF-BRIDGE 8SOIC", Case/Package=SOIC, Max Operating Temperature=150°C, Max Output Current=360mA, Min Operating Temperature=-40°C, Package Quantity=1, Channel Type=Independent, Fall Time=60ns, Halogen Free="Not Halogen Free", Height=0.059inch, Lead Free="Lead Free", Length=0.196inch, Mount="Surface Mount", Number of Channels=2, Number of Drivers=2, Number of Outputs=2, Number of Pins=8, Output Current=360mA, Packaging="Cut Tape", Propagation Delay=680ns, RoHS Compliant=Yes, Series=-, Width=0.157inch
U7 U8 U9: library part CMP-04895-000229-1, "IC CURR SENSE 1 CIRCUIT SOT23-5", Case/Package=SOT-23-5, Input Bias Current=100nA, Input Offset Voltage (Vos)=100uV, Max Operating Temperature=125°C, Min Operating Temperature=-40°C, Operating Supply Current=260uA, -3db Bandwidth=350kHz, Mount="Surface Mount", Number of Circuits=1, Packaging="Tape and Reel", RoHS Compliant=Yes, Slew Rate=2V/µs
Y1: library part CMP-1688-00008-2, "Crystal 24MHz ±20ppm 18pF SMD-4 5mm x 3.2mm", Case/Package=CSMD, ESR (Equivalent Series Resistance)=50R, Frequency Stability=50ppm, Frequency Tolerance=20ppm, Load Capacitance=18pF, Max Operating Temperature=70°C, Min Operating Temperature=-20°C, Operating Frequency="24 MHz", Package Quantity=1000, Resistor Type=Ceramic, Depth=3.2mm, Frequency=24MHz, Height=0.043inch, Lead Free="Lead Free", Length=5mm, Mount="Surface Mount", Number of Pins=4, Packaging="Tape and Reel", REACH SVHC="No SVHC", Series=ABM3B, Series Resistance=50R, Termination=SMD/SMT, Tolerance=20ppm, Width=0.126inch

## Free pads (board coordinates)
  rect 5x5 smd: 14(25.654,3.81) 15(37.465,3.81)
  rect 2.54x2.54 smd: 16(51.308,44.958) 17(51.308,29.464) 18(51.308,13.589)
  rect 1.252x2.54 smd: 19(12.132,52.582) 20(13.97,52.578) 21(15.875,52.578) ""(17.78,52.578)
  rect 2.54x1.252 smd: 23(2.159,19.939) 25(2.159,15.875) ""(2.159,13.716) ""(2.159,18.034)

## Via types
v1: diameter 0.635, hole 0.203, Top Layer to Bottom Layer, 128 vias
v2: diameter 0.5, hole 0.2, Top Layer to Bottom Layer, 37 vias
v3: diameter 0.7, hole 0.25, Top Layer to Bottom Layer, 2 vias

## Nets (pads, with @x,y where several pads share a name; then routed paths per layer and width w, separated by ;. In a path a pad name is that pad's centre, name@x,y a point inside that pad or via, vN(x,y) a via of type N, cw(c..) or ccw(c..) an arc to the next point about the centre after c; other vN are vias at no path point)
+3V3: C5.2 C6.1 C7.1 C8.2 C9.2 C10.2 C11.2 C12.2 C19.1 C23.1 C27.1 FB1.2 pad.19 pad.@2.159,13.716 U3.1 U3.9 U3.24 U3.36 U3.48 U7.5 U8.5 U9.5 | length 207.7
  Top Layer w0.254: 12.2,32.123 12.2,31.147 C9.2 13.059,31.078 13.208,30.929 13.208,30.102 13.357,29.953 U3.1 ; 12.816,21.474 12.816,21.855 12.532,22.139 12.532,22.539 12.446,22.624 12.446,25.781 12.618,25.953 U3.9 ; U3.48 14.702,30.605 14.702,32.308 C8.2 14.775,32.385 15.494,32.385 ; U3.24 20.204,23.532 20.196,23.525 C11.2 20.256,22.098 20.828,22.098 ; U3.36 20.856,29.955 22.483,29.955 C12.2 22.485,31.236 22.479,31.242 ; U9.5 U9.5@32.749,8.803
  Top Layer w0.5: 12.192,32.131 12.192,32.893 ; 12.816,20.839 12.816,21.474 ; 15.494,32.385 16.002,32.385 ; 20.828,22.098 21.463,22.098 ; 22.479,31.242 22.479,31.877 ; 26.67,8.128 30.922,8.128 31.59,7.46 C27.1 ; C27.1@32.749,7.471 U9.5@32.749,8.803 ; 32.809,36.406 C19.1@32.809,38.164 ; C19.1 32.827,39.735 32.842,39.749 U7.5 ; 33.02,21.717 33.02,23.464 33.04,23.484 C23.1 33.059,24.865 33.073,24.88 U8.5
  Top Layer w1: pad.@2.159,13.716 5.842,13.716 7.663,15.537 ; pad.19 12.2,52.459 12.2,36 ; 12.192,32.893 12.192,36 ; 12.816,20.839 12.816,19.786 13.402,19.2 23.247,19.2 23.833,19.786 23.833,21.506 23.241,22.098 21.463,22.098 ; 16.002,32.385 16.51,32.385 17.145,33.02 17.145,36 ; 22.479,31.877 22.479,32.131 v1(23.876,33.528) 23.876,35.179 23.055,36 17.145,36 ; 26.67,8.128 25.146,8.128 24.257,9.017 24.257,10.541 ; 32.814,36.401 32.814,35.664 32.131,34.981 32.131,29.083 30.861,27.813 28.575,27.813 27.813,27.051 27.813,22.733 28.702,21.844 30.861,21.844 32.575,20.13 ; 33.02,21.717 33.02,20.574 32.575,20.13 ; 12.192,36 17.145,36 ; 12.192,36 6.409,36 2.921,32.512 2.921,23.767 6.8,19.888 6.8,17.145 6.8,16.4 8,15.2 14.5,15.2 15.239,14.461 FB1.2 20.299,11.705 21.463,10.541 24.257,10.541 ; 24.257,10.541 25.4,11.684 30.48,11.684 32.131,13.335 32.131,19.685 32.575,20.13
  Bottom Layer w1: v1(23.833,20.385) 23.985,20.385 25.146,21.546 25.146,32.258 v1(23.876,33.528)
+3V3R: C3.1 C4.2 FB1.1 U2.5 U2.6 U2.7 U2.9
  other v2: 14.389,5.269 15.189,5.269 15.989,5.269 14.389,6.069 15.189,6.069 15.989,6.069 14.389,6.869 15.189,6.869 15.989,6.869 14.389,7.669 15.189,7.669 15.989,7.669
+12: C1.1 C2.1 C18.1 C22.1 C26.1 C29.2 C30.2 C31.2 D1.1 D2.1 D3.1 pad.15 Q1.7-8 Q2.7-8 Q3.7-8 U1.1 U1.3 U1.4 U1.5 U1.6 U2.2 U2.3 U2.4 U4.1 U5.1 U6.1 | length 41.4
  Top Layer w0.5: C31.2 27.051,16.98 v1(27.051,17.78) ; C31.2@27.177,16.979 29.334,16.979 U6.1 29.347,18.769 29.64,19.061 D3.1 ; C29.2 v1(27.178,49.276) ; C29.2@27.296,48.209 27.301,48.214 29.475,48.214 U4.1 29.48,49.844 29.866,50.229 D1.1 ; C30.2 C30.2@27.515,32.768 ; v1(27.518,33.856) 27.515,33.853 C30.2@27.515,32.768 ; U5.1@29.681,32.78 U5.1@29.648,32.78 ; D2.1 29.852,34.791 29.559,34.498 29.559,32.87 U5.1@29.648,32.78 ; C30.2@27.515,32.768 27.527,32.78 U5.1@29.648,32.78
  Top Layer w1: 16.413,2.433 U1.5 20.265,2.108 20.851,2.694 20.851,6.119 21.708,6.976 30.108,6.976 32.638,4.446 C1.1
  other v1: 35.179,0.635 36.195,0.635 37.211,0.635 38.354,0.635 39.497,0.635 34.163,1.651 34.163,2.667 34.163,3.683 34.163,4.699 34.163,5.715 47.498,16.256 48.514,16.256 47.498,17.272 48.514,17.272 47.498,18.288 48.514,18.288 47.498,19.304 48.514,19.304 47.498,32.004 48.514,32.004 47.498,33.02 48.514,33.02 47.498,34.036 48.514,34.036 47.498,35.052 48.514,35.052 47.244,47.498 48.26,47.498 47.244,48.514 48.26,48.514 47.244,49.53 48.26,49.53 47.244,50.546 48.26,50.546
DIR: U3.4
EN_CHA: pad.23 U3.10 | length 14.5
  Top Layer w0.254: pad.23 v1(4.445,19.939) ; v1@13.261,25.453 U3.10
  Bottom Layer w0.254: v1(4.445,19.939) 8.382,19.939 12.446,24.003 12.446,24.691 v1(13.208,25.453)
EN_CHB: pad.@2.159,18.034 U3.11 | length 15.8
  Top Layer w0.254: pad.@2.159,18.034 v1(4.318,18.034) ; v1(13.208,24.003) 13.208,24.805 13.357,24.953 U3.11
  Bottom Layer w0.254: v1(4.318,18.034) 8.128,18.034 13.208,23.114 v1(13.208,24.003)
GND: C1.2 C2.2 C3.2 C4.1 C5.1 C6.2 C7.2 C8.1 C9.1 C10.1 C11.1 C12.1 C13.1 C14.1 C15.2 C16.2 C18.2 C19.2 C20.2 C22.2 C23.2 C24.2 C26.2 C27.2 C28.2 C29.1 C30.1 C31.1 D4.1 pad.14 pad.25 pad.@17.78,52.578 R3.1 R7.1 R11.1 U1.2 U2.1 U3.8 U3.23 U3.35 U3.44 U3.47 U3.49 U4.4 U5.4 U6.4 U7.2 U7.4 U8.2 U8.4 U9.2 U9.4 Y1.2 Y1.4 | length 58.3
  Top Layer w0.254: U3.8 14.904,26.453 v2(15.254,26.103) ; U3.47 15.204,29.453 v2(15.254,29.403) ; U3.44 16.704,27.953 v2(17.454,27.203) ; v2(19.654,25.003) 19.704,24.953 U3.23 ; v2(19.654,29.403) 19.704,29.453 U3.35
  Top Layer w0.5: v1(5.003,17.171) 5.029,17.145 C6.2 ; v1(5.359,27.661) 5.369,27.67 5.369,28.669 D4.1 ; v1(5.375,24.919) v1@5.377,24.921 ; C14.1 5.377,25.806 v1@5.377,24.921 ; v1@5.401,24.945 v1@5.377,24.921 ; Y1.4 v1(8.325,25.203) ; v1(8.439,29.203) Y1.2 ; v1(10.405,31.065) 10.411,31.071 11.344,31.071 C9.1 ; C15.2 v1(11.405,27.02) ; C16.2 11.419,29.108 11.419,29.961 v1(11.43,29.972) ; C10.1 13.215,22.615 14.088,22.615 v1(14.097,22.606) ; U2.1 13.275,7.68 13.275,9.001 v1(13.286,9.011) 13.282,9.015 13.282,9.945 C5.1 ; v1(13.284,2.108) U1.2 ; v1(14.699,33.956) C8.1 C8.1 ; C4.1 v1(18.101,10.728) ; C13.1 18.404,21.367 18.404,20.331 v1(18.415,20.32) ; v1(20.193,20.32) 20.195,20.322 C11.1@20.195,21.338 ; v1(22.8,8.7) C7.2 ; C12.1 v1(24.057,29.957) ; v1@27.043,15.338 v1(27.045,15.339) C31.1 ; v1(27.179,46.539) C29.1 ; v1(27.512,31.123) C30.1@27.512,31.985 ; v1(27.889,13.183) U6.4 ; v1(28.06,28.981) 28.063,28.985 U5.4 ; v1(28.064,44.413) U4.4@29.471,44.413 ; C28.2 30.452,10.761 31.462,10.761 31.502,10.72 32.732,10.72 U9.4 ; C20.2 30.447,41.647 v1(31.662,41.647) 32.876,41.647 U7.4 ; C24.2 30.665,26.783 v1(31.878,26.783) 33.091,26.783 U8.4 ; C27.2 33.548,7.451 34.518,7.451 v1(34.527,7.442) ; C19.2 v1(34.668,38.164) ; C23.2@33.839,23.485 v1@34.795,23.485 ; U9.2 v1(36.104,9.764) ; U7.2 v1(36.344,40.699) ; U8.2 v1(36.467,25.83) ; v1(40.32,19.483) v1@40.325,19.487 ; C26.2@41.732,19.487 C26.2
  Top Layer w1: pad.25 v1(4.191,15.875) ; C2.2 v1(10.66,8.94) ; v1(17.78,50.673) pad.@17.78,52.578 ; C3.2 19.151,5.716 v1(19.151,4.835) ; v1@40.132,50.71 C18.2 ; v1@40.325,19.487 C26.2@41.732,19.487 ; v1(40.574,35.308) C22.2@42.095,35.308
  other v1: 23.368,0.635 24.384,0.635 25.4,0.635 26.543,0.635 27.686,0.635 22.352,1.651 22.352,2.667 22.352,3.683 22.352,4.699 22.352,5.715 42.799,6.858 44.069,6.858 45.339,6.858 46.609,6.858 47.879,7.874 47.879,8.89 47.879,10.033 31.425,10.761 47.879,11.176 42.894,22.86 44.164,22.86 45.434,22.86 46.704,22.86 34.796,23.486 47.974,23.876 47.974,24.892 47.974,26.035 47.974,27.178 43.355,38.012 44.625,38.012 45.895,38.012 47.165,38.012 48.435,39.028 48.435,40.044 48.435,41.187 48.435,42.33 40.157,50.825
  other v2: 15.254,25.003 16.354,25.003 17.454,25.003 18.554,25.003 16.354,26.103 17.454,26.103 18.554,26.103 19.654,26.103 15.254,27.203 16.354,27.203 18.554,27.203 19.654,27.203 15.254,28.303 16.354,28.303 17.454,28.303 18.554,28.303 19.654,28.303 16.354,29.403 17.454,29.403 18.554,29.403
HO_A: R1.1 U4.7 | length 2.5
  Top Layer w0.254: U4.7 35.035,46.944 37.489,46.944 R1.1
HO_B: R5.1 U5.7 | length 2.5
  Top Layer w0.254: U5.7 35.263,31.542 37.686,31.542 R5.1
HO_C: R9.1 U6.7 | length 2.5
  Top Layer w0.254: U6.7 34.9,15.726 37.368,15.726 R9.1
HSG_A: Q1.2 R1.2 | length 2.2
  Top Layer w0.254: R1.2 R1.2 40.602,46.94 Q1.2
HSG_B: Q2.2 R5.2 | length 2.2
  Top Layer w0.254: R5.2 38.667,31.546 40.815,31.546 Q2.2
HSG_C: Q3.2 R9.2 | length 2.2
  Top Layer w0.254: R9.2 38.324,15.726 40.477,15.726 Q3.2
LED_A: D4.2 R13.1 | length 3.8
  Top Layer w0.254: D4.2 5.379,30.562 5.944,31.128 R13.1
LED_RES: R13.2 U3.2 | length 5.8
  Top Layer w0.254: R13.2 8.993,31.128 9.606,30.515 11.776,30.515 12.838,29.453 U3.2
LO_A: R2.1 U4.5 | length 2.5
  Top Layer w0.254: U4.5 35.032,44.407 37.492,44.407 R2.1
LO_B: R6.1 U5.5 | length 2.5
  Top Layer w0.254: U5.5 35.262,28.968 37.687,28.968 R6.1
LO_C: R10.1 U6.5 | length 2.5
  Top Layer w0.254: U6.5 37.347,13.183 R10.1
LSG_A: Q1.4 R2.2 | length 2.2
  Top Layer w0.254: R2.2 R2.2 40.602,44.403 Q1.4
LSG_B: Q2.4 R6.2 | length 2.2
  Top Layer w0.254: R6.2 38.674,28.972 40.808,28.972 Q2.4
LSG_C: Q3.4 R10.2 | length 2.2
  Top Layer w0.254: R10.2 38.332,13.171 40.468,13.171 Q3.4
NRST: C14.2 U3.7 | length 9.8
  Top Layer w0.254: C14.2 5.394,26.604 8.392,26.604 v1(8.407,26.619) ; v1(13.081,26.924) 13.108,26.951 14.052,26.951 U3.7
  Bottom Layer w0.254: v1(8.407,26.619) 8.457,26.669 8.457,27.05 9.22,27.813 12.192,27.813 v1(13.081,26.924)
OSC_IN: C16.1 U3.5 Y1.3 | length 7.8
  Top Layer w0.254: Y1.3 7.213,28.903 8.111,28.005 10.454,28.005 10.747,28.298 C16.1 13.206,28.298 13.548,27.955 14.052,27.955 U3.5
OSC_OUT: C15.1 U3.6 Y1.1 | length 6.5
  Top Layer w0.254: Y1.1@9.616,25.203 9.673,25.147 12.018,25.147 12.167,25.296 12.167,27.356 12.421,27.61 13.36,27.61 13.511,27.459 13.777,27.459 U3.6@13.781,27.455
PHASE_A: C17.2 pad.16 Q1.1 Q1.5-6 U4.6 | length 16.9
  Top Layer w0.254: U4.6 39.084,45.679 39.672,46.267 41.45,46.267 ; C17.2 39.495,49.195 40.479,48.211 Q1.1 ; 41.577,46.267 42.237,45.607 42.897,44.946 Q1.5-6
  Top Layer w0.5: Q1.1 40.729,48.211 41.45,47.49 41.45,46.394 42.237,45.607
PHASE_B: C21.2 pad.17 Q2.1 Q2.5-6 U5.6 | length 16
  Top Layer w0.254: U5.6 39.239,30.255 39.909,30.924 41.762,30.924 ; C21.2 39.979,33.527 40.703,32.803 Q2.1 ; 42.476,30.263 43.201,29.537 Q2.5-6
  Top Layer w0.5: Q2.1 40.953,32.678 41.078,32.678 41.698,32.058 41.698,30.988 42.423,30.263 42.476,30.263
PHASE_C: C25.2 pad.18 Q3.1 Q3.5-6 U6.6 | length 13.1
  Top Layer w0.254: U6.6 38.71,14.453 39.336,15.079 41.38,15.079 ; C25.2 39.32,18.028 40.355,16.993 Q3.1
  Top Layer w0.5: Q3.1 40.605,16.868 40.73,16.868 41.345,16.252 41.345,15.113 42.013,14.445
PHASE_SENSE_A: C20.1 R4.1 U3.14 | length 30.8
  Top Layer w0.254: v1(14.986,22.606) 14.986,22.709 15.204,22.927 U3.14 ; v1(28.448,39.751) 29.521,39.751 R4.1 29.563,39.793 29.563,41.62 C20.1
  Bottom Layer w0.254: v1(14.986,22.606) 15.049,22.669 15.049,23.432 14.097,24.384 14.097,30.48 16.764,33.147 21.844,33.147 v1(28.448,39.751)
PHASE_SENSE_B: C24.1 R8.1 U3.15 | length 24.2
  Top Layer w0.254: U3.15 15.704,22.88 15.875,22.709 v1(15.875,22.606) ; C24.1 29.8,26.782 29.8,24.915 R8.1 29.845,24.86 v1(29.845,23.622)
  Bottom Layer w0.254: v1(15.875,22.606) 15.875,22.709 16.017,22.851 16.017,22.944 16.187,23.114 17.25,23.114 17.399,22.965 17.399,19.939 17.907,19.431 26.328,19.431 29.845,22.948 v1(29.845,23.622)
PHASE_SENSE_C: C28.1 R12.1 U3.16 | length 25.3
  Top Layer w0.254: U3.16 16.204,23.532 16.691,23.045 16.691,22.679 v1(16.764,22.606) ; v1(28.226,10.681) 28.248,10.703 29.537,10.703 C28.1 29.525,10.691 29.525,8.881 R12.1
  Bottom Layer w0.254: v1(16.764,22.606) 16.764,19.939 17.653,19.05 24.384,19.05 25.908,17.526 25.908,13 v1(28.226,10.681)
PWM_A: U3.31 U4.2 U4.3 | length 25.6
  Top Layer w0.254: U3.31 23.516,27.453 24.892,28.829 24.892,42.79 27.781,45.679 U4.3 U4.2
PWM_B: U3.30 U5.2 U5.3 | length 11.5
  Top Layer w0.254: U3.30 23.905,26.953 27.207,30.255 U5.3 U5.2
PWM_C: U3.29 U6.2 U6.3 | length 20.3
  Top Layer w0.254: U3.29 23.585,26.453 24.892,25.146 24.892,15.494 25.908,14.478 29.322,14.478 U6.3 ; U6.3@29.266,14.534 29.347,14.615 U6.2
SHUNT_A: Q1.3 R3.2 U7.3 | length 11.4
  Top Layer w0.254: U7.3 37.091,41.649 38.1,40.64 40.349,40.64 R3.2@40.604,40.894
  Top Layer w0.5: Q1.3 40.729,45.546 40.854,45.546 41.472,44.928 41.472,43.494 40.835,42.856 R3.2@40.835,41.126
SHUNT_B: Q2.3 R7.2 U8.3 | length 11.8
  Top Layer w0.254: U8.3 37.228,26.78 38.608,25.4 40.68,25.4 R7.2@40.872,25.592
  Top Layer w0.5: Q2.3 40.953,30.138 41.078,30.138 41.711,29.505 41.711,28.528 40.872,27.689 R7.2@40.872,25.592
SHUNT_C: Q3.3 R11.2 U9.3 | length 12
  Top Layer w0.254: U9.3 37.038,10.714 38.1,9.652 40.537,9.652 R11.2
  Top Layer w0.5: Q3.3 40.605,14.328 40.73,14.328 41.35,13.707 41.35,12.521 40.675,11.846 R11.2
STP: U3.3
SWCLK: pad.20 U3.37 | length 24.6
  Top Layer w0.254: pad.20 13.97,43.932 v3(20.253,37.649) ; U3.37 20.204,34.241 v3(20.217,34.253)
  Bottom Layer w0.254: v3(20.217,34.253) 20.253,34.289 v3(20.253,37.649)
SWDIO: pad.21 U3.34 | length 27.3
  Top Layer w0.254: pad.21 15.875,43.161 v1@21.428,37.608 ; U3.34 21.968,28.953 v1(21.971,28.956) ; v1(21.431,32.024) v1@21.431,34.258
  Bottom Layer w0.254: v1(21.428,37.681) 21.43,37.68 21.43,34.288 v1(21.431,34.286) ; v1(21.431,32.024) 21.971,31.484 v1(21.971,28.956)
UF_CUR_A: R4.2 U7.1 | length 5.1
  Top Layer w0.254: R4.2 30.517,39.768 31.301,40.552 33.84,40.552 34.642,39.749 U7.1
UF_CUR_B: R8.2 U8.1 | length 5.2
  Top Layer w0.254: R8.2 30.774,24.91 31.645,25.781 33.957,25.781 34.858,24.88 U8.1
UF_CUR_C: R12.2 U9.1 | length 5.5
  Top Layer w0.254: R12.2 30.449,9.503 30.598,9.652 33.665,9.652 34.503,8.814 U9.1
VB_A: C17.1 D1.2 U4.8 | length 7
  Top Layer w0.254: U4.8 36.027,48.219 36.576,48.768 36.576,49.784 36.987,50.195 C17.1
  Top Layer w0.5: D1.2 34.255,50.179 34.737,50.179 35.03,49.887 U4.8
VB_B: C21.1 D2.2 U5.8 | length 6.9
  Top Layer w0.254: U5.8 36.859,32.795 37.084,33.02 37.084,34.036 37.575,34.527 C21.1
  Top Layer w0.5: D2.2 34.9,34.791 35.274,34.417 35.274,32.822 U5.8
VB_C: C25.1 D3.2 U6.8 | length 7.1
  Top Layer w0.254: U6.8@34.944,17.039 35.962,17.039 36.449,17.526 36.449,18.415 37.062,19.028 C25.1
  Top Layer w0.5: D3.2 34.115,19.011 34.632,19.011 34.925,18.719 34.925,17.02 U6.8 U6.8@34.944,17.039
vcap1: C13.2 U3.22 | length 2.3
  Top Layer w0.254: C13.2 18.393,22.751 18.542,22.9 19.055,22.9 19.204,23.049 U3.22
pads on no net: D1. D2. D3. U2.8 U3.12 U3.13 U3.17 U3.18 U3.19 U3.20 U3.21 U3.25 U3.26 U3.27 U3.28 U3.32 U3.33 U3.38 U3.39 U3.40 U3.41 U3.42 U3.43 U3.45 U3.46

## Polygon pours and split planes (outlines as drawn)
PHASE_C on Top Layer "NONET_L02_P-001" (solid, remove dead copper, pour order 25): 42.702,14.859 52.608,14.859 52.608,12.323 42.709,12.323
PHASE_B on Top Layer "NONET_L02_P-001" (solid, remove dead copper, pour order 24): 42.702,30.734 52.608,30.734 52.608,28.198 42.709,28.198
PHASE_A on Top Layer "NONET_L02_P-001" (solid, remove dead copper, pour order 23): 42.702,46.228 52.608,46.228 52.608,43.692 42.709,43.692
GND on Top Layer "NONET_L02_P-001" (solid, pour order 21): 21.59,5.715 22.225,6.35 28.194,6.35 28.575,5.969 28.575,3.81 28.829,3.556 29.972,3.556 30.099,3.429 30.099,2.032 29.972,1.905 28.829,1.905 28.575,1.651 28.575,0.381 28.321,0.127 21.844,0.127 21.59,0.381
+12 on Top Layer "NONET_L02_P-001" (solid, pour order 20): 32.004,3.81 31.75,3.556 31.75,2.159 32.004,1.905 33.274,1.905 33.401,1.778 33.401,0.381 33.655,0.127 40.259,0.127 40.513,0.381 40.513,6.477 40.259,6.731 33.655,6.731 33.401,6.477 33.401,3.937 33.274,3.81
+12 on Top Layer "NONET_L02_P-001" (solid, pour order 5): 17.5,1.5 17,1 13,1 12.5,1.5 12.5,4.5 11.8,5.2 9.8,5.2 9.7,5.3 9.7,6.4 9.8,6.5 12,6.5 12.7,7.2 13.7,7.2 13.9,7 13.9,4.9 15.5,3.3 16.7,3.3 17.5,2.5
+12 on Top Layer "NONET_L02_P-001" (solid, pour order 19): 41.826,46.59 48.997,46.59 48.997,51.41 44.577,51.41 44.577,49.555 44.126,49.105 41.826,49.105
+12 on Top Layer "NONET_L02_P-001" (solid, pour order 18): 42.08,31.146 49.174,31.146 49.174,35.966 44.831,35.966 44.831,34.112 44.38,33.661 42.08,33.661
+12 on Top Layer "NONET_L02_P-001" (solid, pour order 16): 41.725,15.348 49.022,15.348 49.022,20.168 44.475,20.168 44.475,18.313 44.025,17.863 41.725,17.863
GND on Top Layer "NONET_L02_P-001" (solid, pour order 10): 44.704,11.811 48.26,11.811 48.768,11.303 48.768,6.731 48.26,6.223 42.672,6.223 42.164,6.731 42.164,7.747 42.672,8.255 43.688,8.255 44.196,8.763 44.196,11.303
GND on Top Layer "NONET_L02_P-001" (solid, pour order 9): 44.799,27.813 48.355,27.813 48.863,27.305 48.863,22.733 48.355,22.225 42.767,22.225 42.259,22.733 42.259,23.749 42.767,24.257 43.783,24.257 44.291,24.765 44.291,27.305
GND on Top Layer "NONET_L02_P-001" (solid, pour order 8): 45.26,43.092 48.816,43.092 49.324,42.584 49.324,38.012 48.816,37.504 43.228,37.504 42.72,38.012 42.72,39.028 43.228,39.536 44.244,39.536 44.752,40.044 44.752,42.584
+3V3 on Top Layer "NONET_L02_P-001" (solid, pour order 7): 13,10.4 12.9,10.5 12.9,11 13,11.1 13.8,11.1 14.5,11.8 14.5,12.1 14.6,12.2 15.9,12.2 16,12.1 16,11.2 15.9,11.1 15,11.1 14.3,10.4 14.1,10.4
+3V3R on Top Layer "NONET_L02_P-001" (solid, pour order 6): 16.25,5 14.1,5 14.1,9.3 14.4,9.6 14.4,10.2 14.6,10.4 16.8,10.4 16.9,10.3 17.5,10.3 17.6,10.2 17.6,8.4 18.25,7.75 19.75,7.75 20,7.5 20,6.75 19.75,6.5 18,6.5 17.75,6.25 17.75,5 17.5,4.75 16.5,4.75
GND on Layer 1 "NONET_L02_P-001" (solid, pour order 0): 0.006,4.006 0.006,52.406 cw(c4.006,52.406) 4.006,56.406 52.406,56.406 cw(c52.406,52.406) 56.406,52.406 56.406,4.006 cw(c52.406,4.006) 52.406,0.006 4.006,0.006 cw(c4.006,4.006)
GND on Layer 2 "NONET_L02_P-001" (solid, pour order 1): 0.006,4.006 0.006,52.406 cw(c4.006,52.406) 4.006,56.406 52.406,56.406 cw(c52.406,52.406) 56.406,52.406 56.406,4.006 cw(c52.406,4.006) 52.406,0.006 4.006,0.006 cw(c4.006,4.006)
+12 on Bottom Layer "NONET_L02_P-001" (solid, pour order 15): 3.982,-0.007 cw(c3.982,3.993) -0.018,3.993 -0.018,52.393 cw(c3.982,52.393) 3.982,56.393 52.382,56.393 cw(c52.382,52.393) 56.382,52.393 56.382,3.993 cw(c52.382,3.993) 52.382,-0.007

## Silkscreen, mask and mechanical layers (free items; w line width, h text height)
Top Overlay:
  text "GND" at 18.061,48.106 h0.5 r90
  text "3V3" at 11.584,47.598 h0.5 r90
  text "SWCLK" at 13.743,47.598 h0.5 r90
  text "SWDIO" at 15.648,47.598 h0.5 r90
  text "PH_A" at 49.276,46.99 h1.52
  text "S-WIRE" at 10.795,44.704 h1.52
  text "PH_B" at 49.53,31.623 h1.52
  text "CH_A" at 5.561,19.741 h0.5
  text "CHA_B" at 5.434,18.344 h0.5
  text "PH_C" at 49.276,15.748 h1.52
  text "GND" at 4.037,14.578 h0.5
  text "ENCODER" at 10.291,12.95 h1.27 r90
  text "3V3" at 4.164,12.165 h0.5
  text "+12" at 41.275,1.905 h1.52
  text "GND" at 16.891,1.778 h1.52
Mechanical 1:
  circle w0.013: c4.656,4.656 r2.5
  circle w0.013: c51.756,51.756 r2.5
  circle w0.013: c4.656,51.756 r2.5
  circle w0.013: c51.756,4.656 r2.5
  lines w0.013: 0.006,4.006 ccw(c4.006,4.006) 4.006,0.006 52.406,0.006 ccw(c52.406,4.006) 56.406,4.006 56.406,52.406 ccw(c52.406,52.406) 52.406,56.406 4.006,56.406 ccw(c4.006,52.406) 0.006,52.406 0.006,4.006

## Text inside footprints (layer, text, board x,y; h text height)
D4: Top Overlay "+" at 4.795,29.564 h0.7 r90